# Altium PCB PCB2.PcbDoc
Units mm, origin at the board's own origin, x right, y up, seen from the top; angles counter-clockwise.
Board outline 152.4 x 101.6 mm, 4 copper layers (Top Layer, Mid-Layer 2, Mid-Layer 3, Bottom Layer); 27 components, 31 nets, 90 pads, 3 vias.
Unrouted connection lines stored in the file: 4.
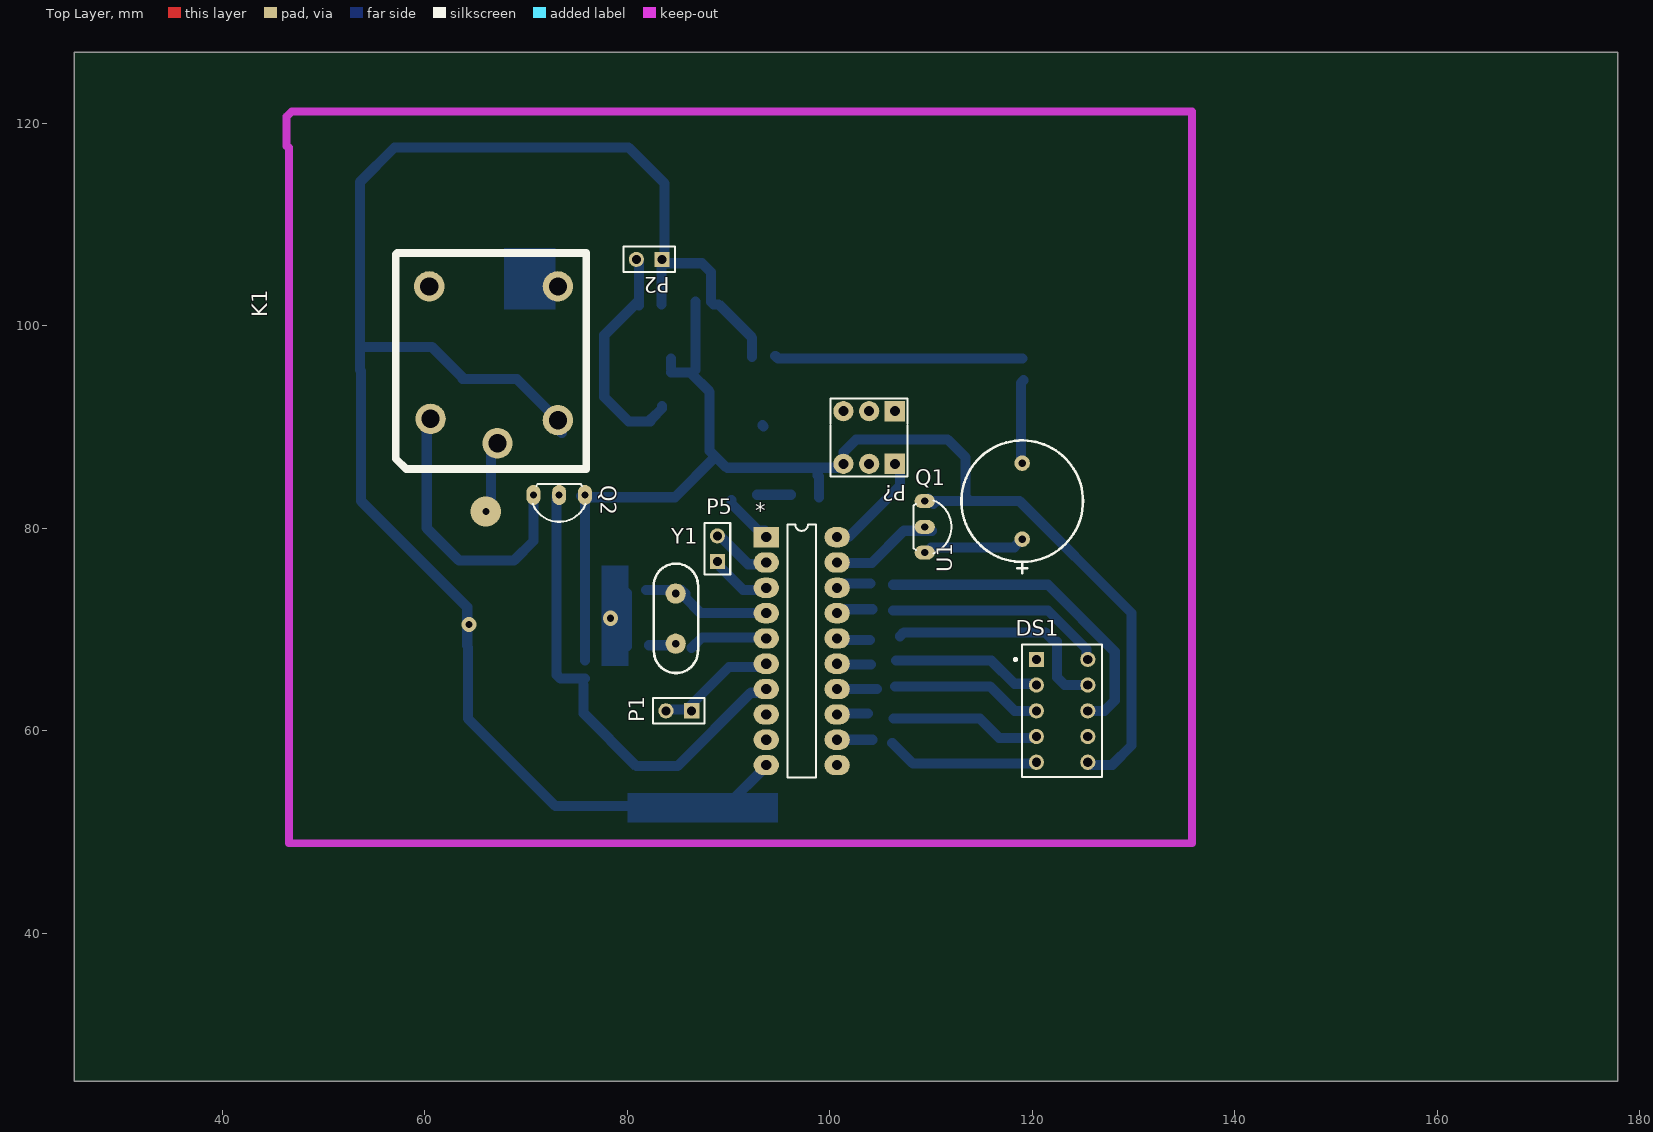
[diagram p0: Top Layer view]
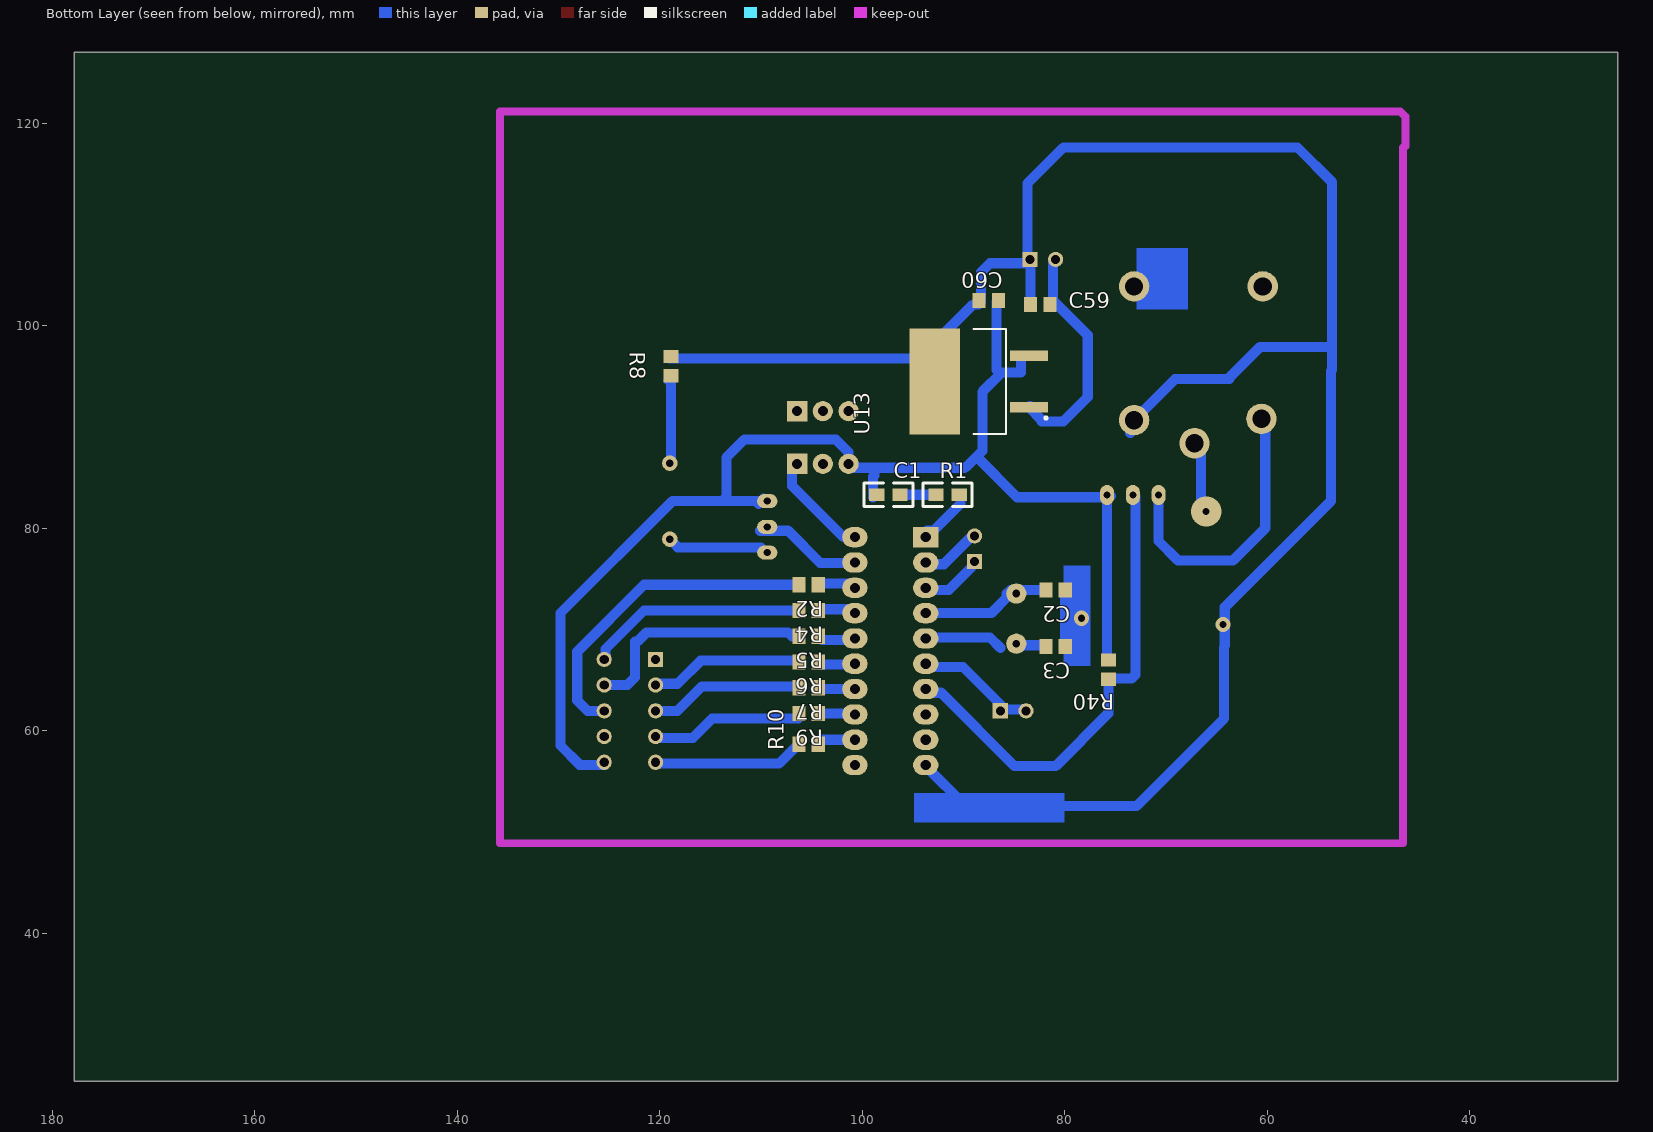
[diagram p1: Bottom Layer view, seen from below]
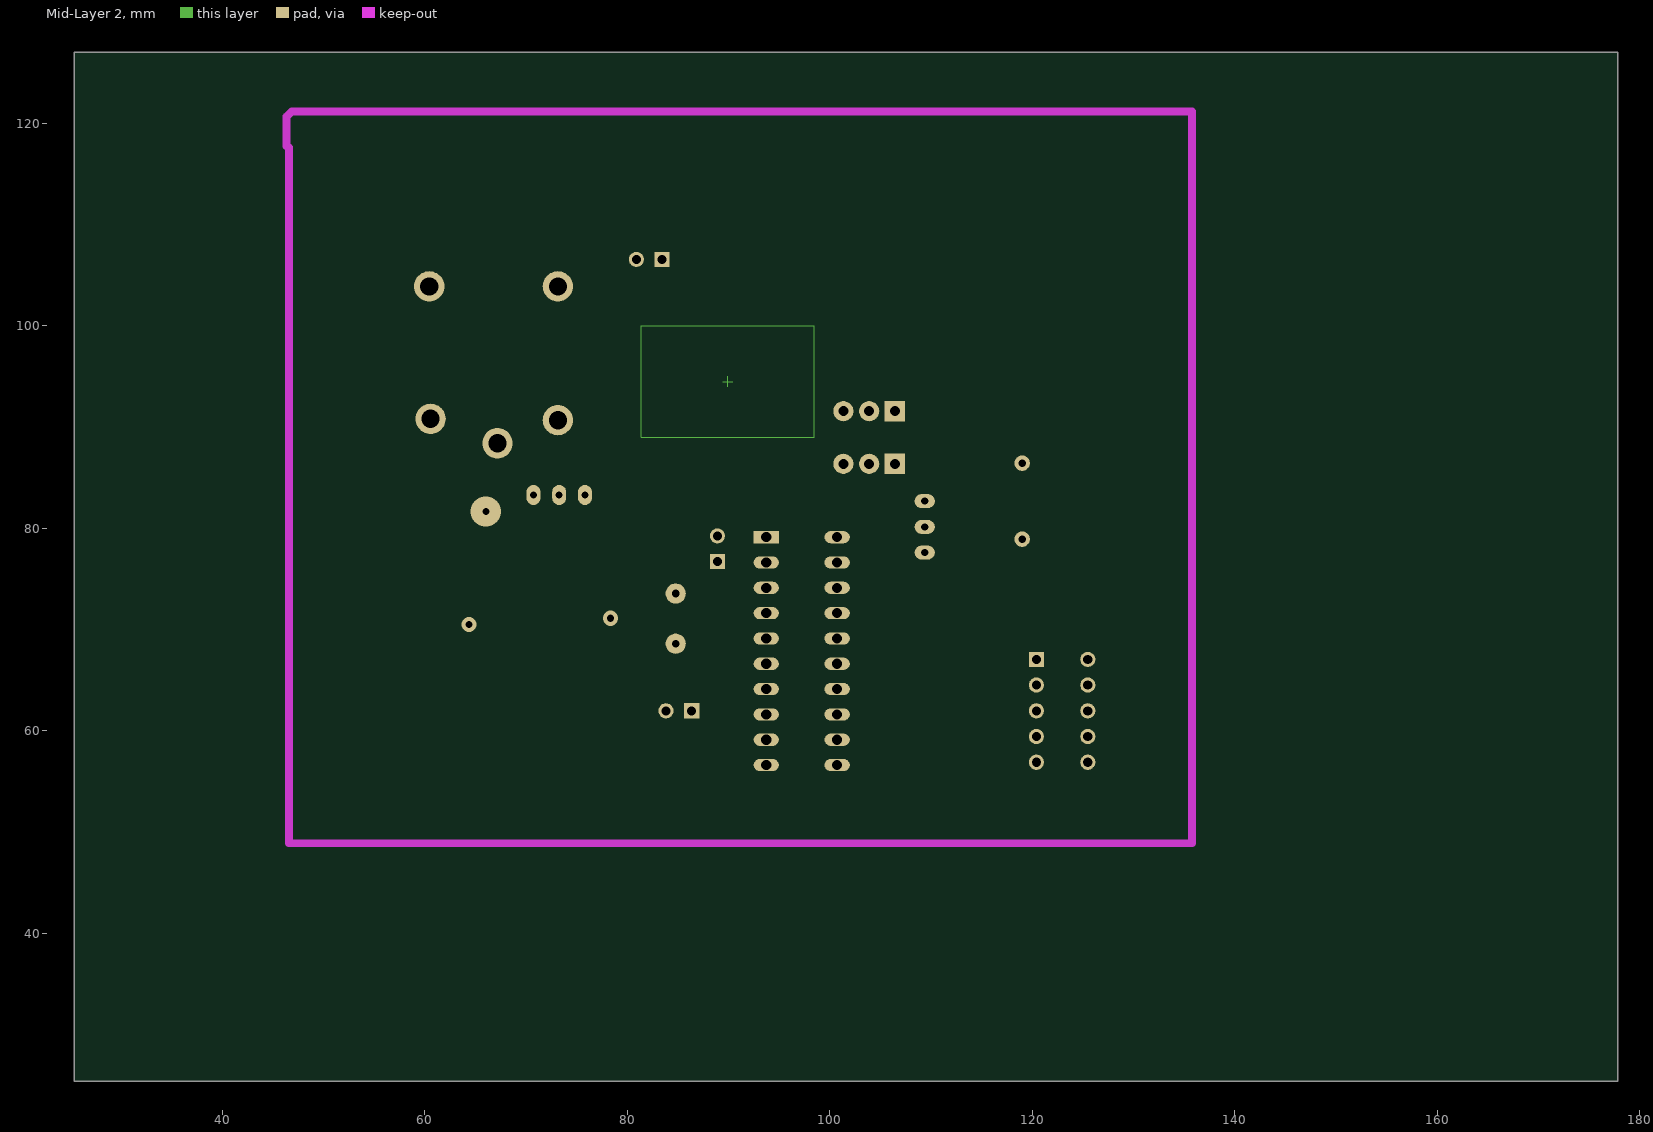
[diagram p2: Mid-Layer 2]
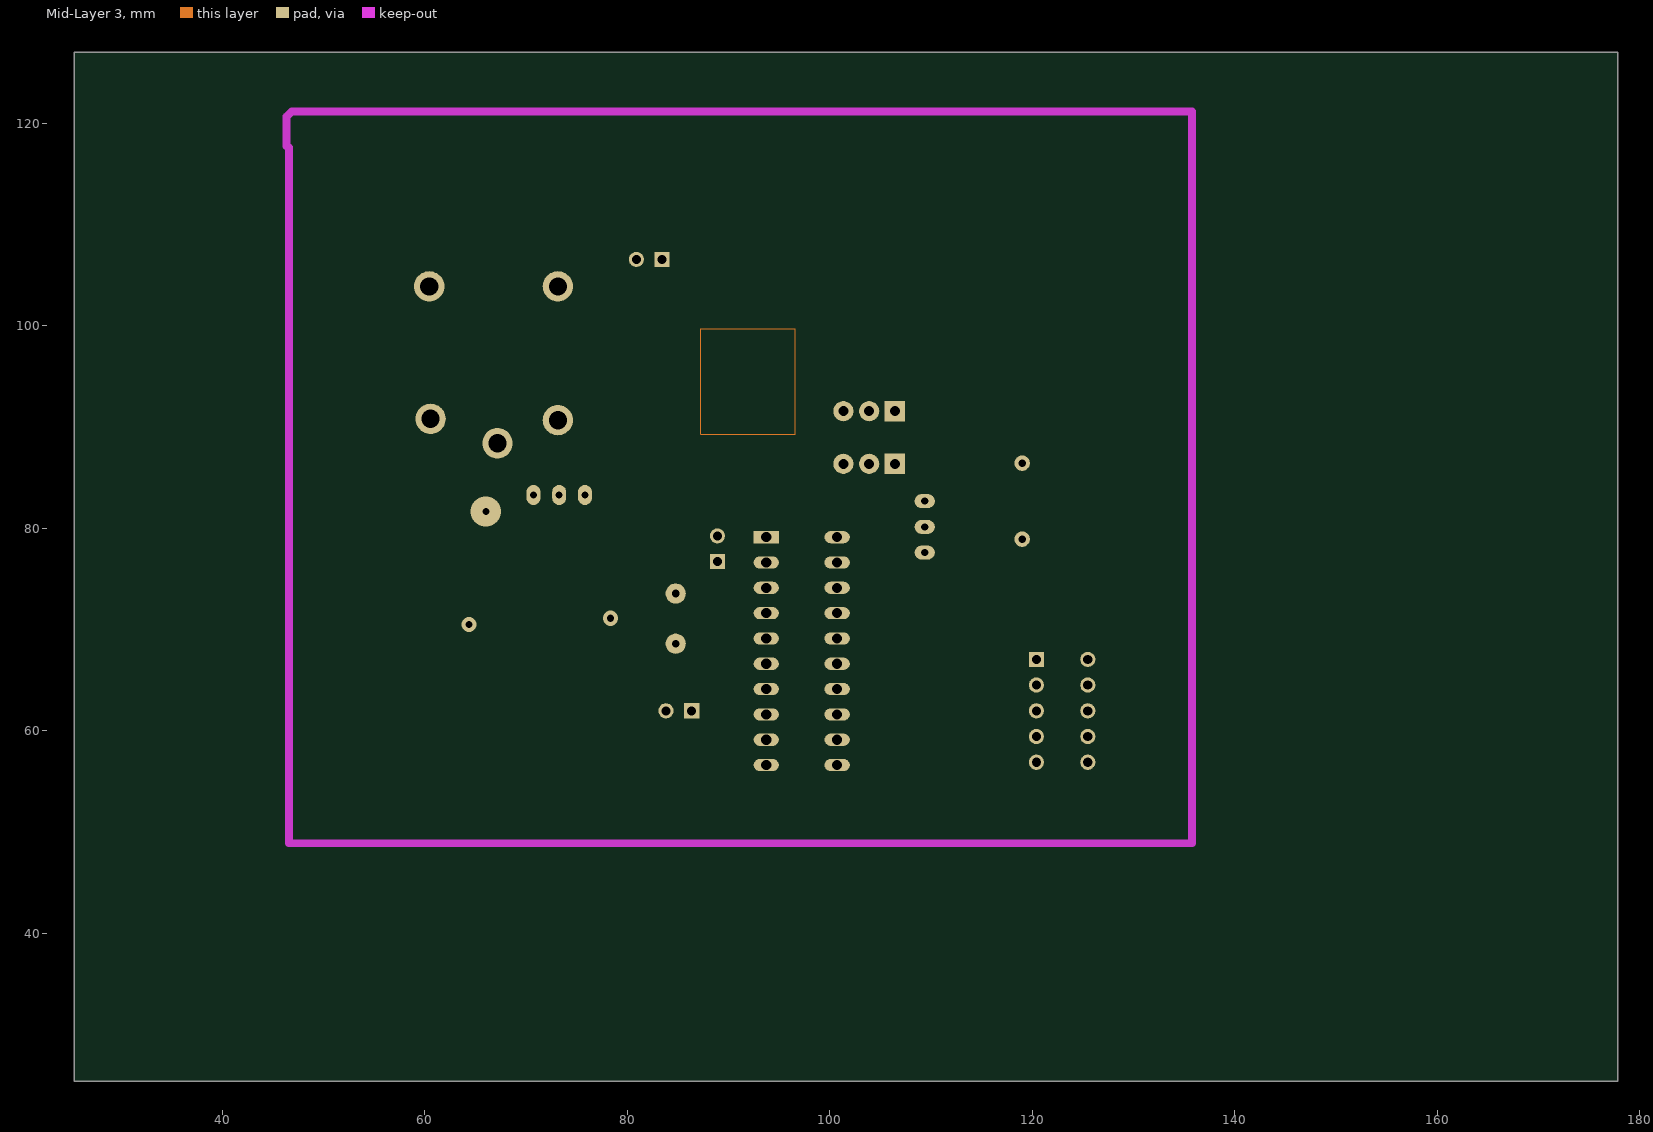
[diagram p3: Mid-Layer 3]

## Layer stack, top to bottom
Top Layer: signal copper 0.0356
Dielectric: dielectric 0.32, FR-4, Dk 4.8
Mid-Layer 2: signal copper 0.0356
Dielectric: dielectric 0.32, FR-4, Dk 4.8
Mid-Layer 3: signal copper 0.0356
Dielectric: dielectric 0.32, FR-4, Dk 4.8
Bottom Layer: signal copper 0.0356

## Board outline
25.4,25.4 177.8,25.4 177.8,127 25.4,127

## Design rules (kind name [scope] priority, off if disabled: settings)
Clearance [All] p1: gap=0.254
ComponentClearance [All] p1: gap=0.254 collisioncheckmode=3 verticalgap=0.254
PolygonConnect [All] p1: connectstyle=Relief reliefconductorwidth=0.254 reliefentries=4 polygonreliefangle="90 Angle"
RoutingVias [All] p1: holewidth=0.711 width=1.27 viastyle="Through Hole" minholewidth=0.711 minwidth=1.27 maxholewidth=0.711 maxwidth=1.27
SolderMaskExpansion [All] p1: expansion=0.102
TestPointUsage [All] p1: valid=0 allowmultiple=FALSE
Testpoint [All] p1: side=15 testpointundercomponent=TRUE minsize=1.016 maxsize=2.54 preferedsize=1.524 minholesize=0 maxholesize=1.016 preferedholesize=0.813 testpointgrid=0.025 style=1023 order=0123456789
Width [All] p1: maxlimit=3 minlimit=0.254 preferedwidth=0.254 midlayer2_maxwidth=2 midlayer3_maxwidth=2 bottomlayer_maxwidth=2 minimp=50.000000 maximp=50.000000 favimp=50.000000
18 further rules are at their usual default settings.

## Components (designator, comment, footprint, x,y, rotation, side; value= is the part's Value field where it differs from the comment)
* "U?" DIP20 93.726,79.121 r0 top
C1 "ELECTRO1" 0805 98.552,83.312 r180 bottom
C2 "Cap" 6-0805 80.899,73.914 r0 bottom
C3 "Cap" 6-0805 80.899,68.326 r0 bottom
C59 "Cap" 6-0805 82.423,102.108 r180 bottom
C60 "Cap" 6-0805 87.503,102.489 r180 bottom
DS1 "Dpy Red-CA" LEDDIP-10 122.936,61.976 r0 top
K1 "Relay-SPDT" relay 63.119,111.506 r180 top
P1 "Header 2" HDR1X2 86.36,61.976 r180 top
P2 "MHDR1X2" HDR1X2 83.439,106.553 r180 top
P5 "Header 2" HDR1X2 88.9,76.708 r90 top
P? "Header 3X2" PCBComponent_1 105.664,88.392 r180 top
Q1 "QNPN" 9014 109.347,80.137 r0 top
Q2 "QNPN" 9014 73.279,83.312 r270 top
R1 "RES1" 0805 90.424,83.312 r0 bottom
R2 "Res2" 6-0805 105.283,74.422 r0 bottom
R4 "Res2" 6-0805 105.283,71.882 r0 bottom
R5 "Res2" 6-0805 105.283,69.342 r0 bottom
R6 "Res2" 6-0805 105.283,66.802 r0 bottom
R7 "Res2" 6-0805 105.283,64.262 r0 bottom
R8 "Res2" 6-0805 118.872,96.012 r270 bottom
R9 "Res2" 6-0805 105.283,61.722 r0 bottom
R10 "Res2" 6-0805 105.283,58.674 r0 bottom
R40 "Res2" 6-0805 75.692,66.04 r270 bottom
U1 "BELL" BUZZR 118.999,82.677 r90 top
U13 "LM5V" TO254P1543X460-3N_MC7805 89.916,94.488 r0 bottom
Y1 "XTAL" JZ 84.836,71.12 r90 top

## Footprints (in the part's own frame and the unit in brackets; to place one, negate y for a bottom-side part, rotate by r counter-clockwise, add the part's x,y. Pads: shape width x height; smd on the part's side, far side on the other; paste and mask are expansions set on the pad)
6-0805 [mm] "Chip Resistor; Body 2.0 x 1.3 mm (LxW typ)"
  rect 1.3x1.5 smd: 1(-0.95,0) 2(0.95,0)
0805 [mil]
  rect 60x50 smd: 1(0,0) 2(90,0)
  silkscreen extent -50,-45 140,45
9014 [mm]
  oval 2x1.38 hole 0.7: 1(0.025,2.541) 2(0.025,0.001) 3(0.025,-2.539)
  silkscreen extent -1.08,-2.61 2.67,2.61
BUZZR [mil]
  round 60 hole 30: 1(-147.64,0) 2(147.64,0)
  silkscreen extent -280,-236 236,236
DIP20 [mm]
  rect 2.5x2 / inner rect 2.5x1.2 / far side rect 2.5x2 hole 1: 1(0,0)
  oval 2.5x2 / inner oval 2.5x1.2 / far side oval 2.5x2 hole 1: 2(0,-2.5) 3(0,-5) 4(0,-7.5) 5(0,-10) 6(0,-12.5) 7(0,-15) 8(0,-17.5) 9(0,-20) 10(0,-22.5) 11(7,-22.5) 12(7,-20) 13(7,-17.5) 14(7,-15) 15(7,-12.5) 16(7,-10) 17(7,-7.5) 18(7,-5) 19(7,-2.5) 20(7,0)
  silkscreen extent 2.08,-23.75 4.92,1.25
HDR1X2 [mm] "Connector; Header; 2 Position"
  rect 1.5x1.5 hole 0.9: 1(0,0)
  round 1.5 hole 0.9: 2(2.54,0)
  silkscreen extent -1.27,-1.27 3.81,1.27
JZ [mm]
  round 2 hole 0.762: 1(-2.517,0.055) 2(2.436,0.055)
  silkscreen extent -5.41,-2.18 5.39,2.24
LEDDIP-10 [mm] "LED, 7-Segment Display, 7.62 mm, RHD; 10 Leads; Row Space 5.08 mm; Pitch 2.54 mm"
  rect 1.5x1.5 hole 0.9: 1(-2.54,5.08)
  round 1.5 hole 0.9: 2(-2.54,2.54) 3(-2.54,0) 4(-2.54,-2.54) 5(-2.54,-5.08) 6(2.54,-5.08) 7(2.54,-2.54) 8(2.54,0) 9(2.54,2.54) 10(2.54,5.08)
  silkscreen extent -4.72,-6.55 3.95,6.55
PCBComponent_1 [mm]
  rect 2x2 hole 1: 1(-0.762,2.032) 4(-0.762,-3.175)
  round 2 hole 1: 2(1.778,2.032) 3(4.318,2.032) 5(1.778,-3.175) 6(4.318,-3.175)
  silkscreen extent -2.03,-4.44 5.59,3.3
relay [mm]
  round 3 hole 1.8 mask+0: 1(-4.064,23.114) 2(2.667,7.62) 3(-10.033,7.62) 4(2.54,20.701) 5(-10.033,20.828)
  silkscreen extent -12.83,4.32 5.97,25.65
TO254P1543X460-3N_MC7805 [mm]
  rect 3.75x1.05 smd: 1(-6.4,2.54) 2(-6.4,-2.54)
  rect 5x10.5 smd: 3(2.921,0)
  Mid-Layer 2 lines w0.05: -0.5,0 0.5,0 ; 0,0.5 0,-0.5 ; -8.55,5.5 -8.55,-5.5 8.55,-5.5 8.55,5.5 -8.55,5.5
  Mid-Layer 3 lines w0.001: -2.682,5.2 6.668,5.2 6.668,-5.2 -2.682,-5.2 -2.682,5.2
  silkscreen extent -8.17,-5.2 -0.92,5.2

## Part data
*: library part 2051
C1: "Electrolytic Capacitor"
C2 C3 C59 C60: "Capacitor"
DS1: "7.62 mm Black Surface HER 7-Segment Display: CA, RH DP"
K1: "Single-Pole Dual-Throw Relay"
P1 P2 P5: "Header, 2-Pin"
P?: "Header, 3-Pin, Dual row"
Q1 Q2: "NPN Bipolar Transistor"
R2 R4 R5 R6 R7 R8 R9 R10 R40: "Resistor"
U1: "Bell"
U13: library part LM1117-3.3V
Y1: "Crystal Oscillator"

## Via types
v1: diameter 1.5, hole 0.7, Top Layer to Bottom Layer, 2 vias
v2: diameter 3, hole 0.7, Top Layer to Bottom Layer, 1 vias

## Nets (pads, with @x,y where several pads share a name; then routed paths per layer and width w, separated by ;. In a path a pad name is that pad's centre, name@x,y a point inside that pad or via, vN(x,y) a via of type N, cw(c..) or ccw(c..) an arc to the next point about the centre after c; other vN are vias at no path point)
+12VCCIN: C59.2 K1.1 P2.2 U13.1 | length 29.4
  Bottom Layer w1: v2@65.786,81.788 66.548,82.55 K1.1@66.548,88.138 ; C59.2@81.026,102.362 77.724,99.06 77.724,92.964 80.137,90.551 82.296,90.551 ; C59.2@81.153,101.981 P2.2@81.153,106.553 ; 82.296,90.805 82.423,90.805 83.439,91.821 U13.1@83.439,92.075
  other v2: 66.04,81.661
+12VCCOUT: K1.3
A: DS1.10 R4.2 | length 21.8
  Bottom Layer w1: R4.2 121.539,71.882 125.349,68.072 DS1.10@125.349,66.929
B: DS1.9 R5.2 | length 22.9
  Bottom Layer w1: 106.934,69.342 107.315,69.723 121.285,69.723 122.174,68.834 ; 122.428,68.834 122.428,65.278 123.19,64.516 DS1.9@125.73,64.516
C: DS1.8 R2.2 | length 32.4
  Bottom Layer w1: R2.2 121.539,74.422 128.143,67.818 128.143,62.992 127.127,61.976 DS1.8@125.603,61.976
CATCH: *.6 P1.1 P1.2 | length 11.8
  Bottom Layer w1: P1.2@83.693,62.103 85.852,62.103 90.043,66.294 *.6@93.726,66.294
D: DS1.5 R10.2 | length 15.1
  Bottom Layer w1: R10.2@106.172,58.801 108.204,56.769 DS1.5@120.396,56.769
E: DS1.4 R9.2 | length 14.8
  Bottom Layer w1: R9.2@106.299,61.214 114.808,61.214 116.713,59.309 DS1.4@120.269,59.309
F: DS1.2 R6.2 | length 14.7
  Bottom Layer w1: R6.2@106.553,66.929 115.951,66.929 118.237,64.643 DS1.2@120.269,64.643
G: DS1.3 R7.2 | length 14.8
  Bottom Layer w1: R7.2@106.426,64.389 115.824,64.389 118.237,61.976 DS1.3@120.269,61.976
GND: *.10 C2.1 C3.1 C59.1 C60.1 K1.5 P2.1 R8.1 U13.3 | length 205
  Bottom Layer w1: 53.721,97.917 60.706,97.917 63.754,94.869 ; 63.754,94.742 69.088,94.742 K1.5@73.406,90.424 ; 64.201,68.453 64.201,72.197 53.721,82.677 53.721,95.504 53.594,95.631 53.594,114.173 57.023,117.602 80.137,117.602 83.693,114.046 P2.1@83.693,106.426 ; 64.262,68.199 64.262,61.214 72.898,52.578 89.789,52.578 *.10@93.726,56.515 ; K1.5@73.533,89.408 K1.5@73.533,89.789 ; C2.1@79.756,73.787 79.949,73.594 C3.1 ; C59.1 83.373,106.106 83.439,106.172 87.376,106.172 88.265,105.283 C60.1@88.265,102.362 ; C60.1@88.519,102.108 89.027,102.108 92.329,98.806 U13.3@92.329,96.901 ; U13.3@93.345,90.17 U13.3@93.472,90.043 ; U13.3@94.615,97.028 94.869,96.774 R8.1@118.999,96.774
  other v1: 64.389,70.485 78.359,71.12
Net*_1: *.1 R1.1 | length 5.3
  Bottom Layer w1: R1.1@90.297,82.804 90.297,82.423 92.964,79.756 *.1@93.599,79.756 ; *.1@93.345,79.502 *.1
Net*_2: *.2 P5.2 | length 5.8
  Bottom Layer w1: P5.2@89.281,79.121 91.948,76.454 *.2@93.98,76.454
Net*_3: *.3 P5.1 | length 5.2
  Bottom Layer w1: P5.1@89.281,76.073 91.44,73.914 *.3@93.599,73.914
Net*_4: *.4 C2.2 Y1.2 | length 12.8
  Bottom Layer w1: C2.2 85.344,73.914 Y1.2@85.725,73.533 ; Y1.2@85.598,73.279 87.256,71.621 *.4
Net*_5: *.5 C3.2 Y1.1 | length 10.5
  Bottom Layer w1: C3.2@82.169,68.453 Y1.1@85.09,68.453 ; 86.36,68.199 87.376,69.215 *.5@93.472,69.215
Net*_12: *.12 R10.1 | length 3.5
  Bottom Layer w1: *.12 R10.1@104.201,59.121
Net*_13: *.13 R9.1 | length 2.5
  Bottom Layer w1: *.13@101.219,61.722 R9.1@103.759,61.722
Net*_14: *.14 R7.1 | length 3.9
  Bottom Layer w1: *.14 R7.1@104.634,64.121
Net*_15: *.15 R6.1 | length 3
  Bottom Layer w1: *.15@101.092,66.548 R6.1@104.079,66.548
Net*_16: *.16 R5.1 | length 3
  Bottom Layer w1: *.16@100.965,68.961 R5.1@103.952,68.961
Net*_17: *.17 R4.1 | length 2.7
  Bottom Layer w1: *.17@101.473,72.009 R4.1@104.206,72.009
Net*_18: *.18 R2.1 | length 3.7
  Bottom Layer w1: *.18@100.33,74.549 R2.1@104.013,74.549
NetC1_2: C1.2 R1.2 | length 3.3
  Bottom Layer w1: R1.2@92.837,83.312 C1.2@96.139,83.312
NetK1_4: K1.4 Q2.3 | length 27.9
  Bottom Layer w1: K1.4@60.198,90.424 60.198,80.01 63.373,76.835 68.834,76.835 70.739,78.74 Q2.3@70.739,83.566
NetQ1_3: Q1.3 U1.1 | length 9.4
  Bottom Layer w1: Q1.3@109.982,78.105 118.237,78.105 118.237,78.165 U1.1
NetR8_2: R8.2 U1.2 | length 8.5
  Bottom Layer w1: U1.2@118.872,86.233 118.872,94.361 R8.2@119.126,94.615
P1.7: *.19 Q1.2 | length 10.3
  Bottom Layer w1: *.19@101.092,76.581 104.14,76.581 107.315,79.756 Q1.2@110.109,79.756
P3.3: *.7 Q2.2 R40.2 | length 46.9
  Bottom Layer w1: Q2.2@73.152,83.312 73.025,83.185 73.025,65.532 73.406,65.151 R40.2@75.819,65.151 ; R40.2@75.692,64.516 75.692,61.722 80.899,56.515 84.963,56.515 92.202,63.754 *.7@93.726,63.754 ; *.7@93.472,64.516 *.7@93.599,64.389
VCC: C1.1 C60.2 DS1.1 DS1.6 P?.3 Q1.1 Q2.1 R40.1 U13.2 | length 127.2
  Bottom Layer w1: Q2.1@75.438,83.185 75.819,82.804 R40.1@75.819,66.929 ; Q2.1@76.327,83.058 84.709,83.058 88.704,87.053 ; 84.328,95.377 86.233,95.377 88.138,93.472 88.138,87.63 89.662,86.106 ; 84.328,95.758 U13.2@84.328,96.774 ; 86.487,95.377 86.741,95.631 C60.2@86.741,102.362 ; 89.916,85.979 100.965,85.979 P?.3@101.473,86.487 ; 98.806,85.725 98.806,85.217 98.933,85.09 C1.1@98.933,83.058 ; P?.3@101.346,86.614 101.346,87.503 102.616,88.773 111.633,88.773 113.411,86.995 113.411,83.058 113.665,82.804 ; Q1.1@109.728,82.931 Q1.1@110.236,82.423 ; Q1.1@110.236,82.677 118.745,82.677 129.794,71.628 129.794,58.547 127.889,56.642 DS1.6@125.476,56.642
VDD: *.20 P?.1 | length 9.6
  Bottom Layer w1: *.20@101.092,79.121 101.854,79.121 106.934,84.201 P?.1@106.934,85.852
pads on no net: *.8 *.9 *.11 DS1.7 K1.2 P?.2 P?.4 P?.5 P?.6

## Keep-outs
Keep-Out Layer:
  lines w0.762: 46.355,117.729 46.355,120.65 46.863,121.158 135.763,121.158 135.763,48.895 46.609,48.895 46.609,117.602

## Other copper
Bottom Layer:
  rectangle net +12VCCOUT: 67.818,101.6 72.898,107.696
  rectangle net +12VCCOUT: 70.358,102.743 72.644,105.156
  rectangle net GND: 80.01,50.927 94.869,53.848
  rectangle net GND: 77.47,66.421 80.137,76.327

## Text inside footprints (layer, text, board x,y; h text height)
U13: Mechanical 15 "1" at 90.366,94.652 h1.02 r90